# Altium PCB Bargraph_64.PcbDoc
Units mil, origin at the board's own origin, x right, y up, seen from the top; angles counter-clockwise.
Board outline 3937.01 x 196.85 mil, 2 copper layers (Top Layer, Bottom Layer); 65 components, 16 nets, 144 pads, 67 vias.
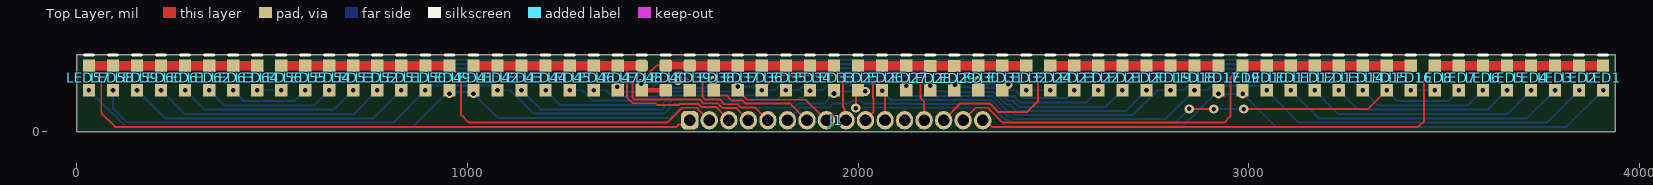
[diagram p0: Top Layer view]
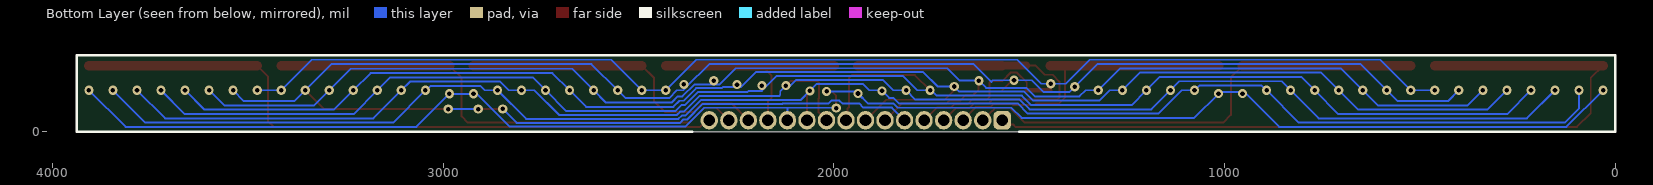
[diagram p1: Bottom Layer view, seen from below]
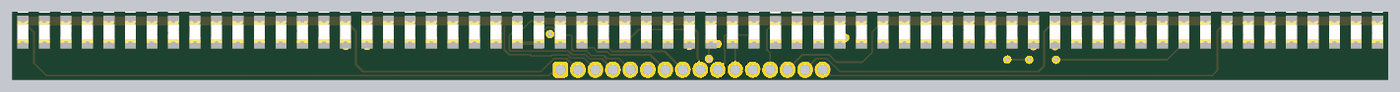
[diagram p2: 3D render of the assembled board from above, using the file's embedded part models]

## Layer stack, top to bottom
Top Solder: solder mask 0.4, Solder Resist, Dk 3.5
Top Layer: signal copper 1.4
Dielectric 1: dielectric 12.6, FR-4, Dk 4.8
Bottom Layer: signal copper 1.4
Bottom Solder: solder mask 0.4, Solder Resist, Dk 3.5

## Board outline
0.08,0.35 3937.09,0.35 3937.09,197.2 0.08,197.2

## Design rules (kind name [scope] priority, off if disabled: settings)
BoardOutlineClearance [All] p1: gap=10 ignorepadtopadclearanceinfootprint=FALSE except(0: Arc-SplitContinuation Track-SplitContinuation SMDPad-SplitContinuation THPad-SplitContinuation Via-SplitContinuation Fill-SplitContinuation Poly-SplitContinuation Region-SplitContinuation Text-SplitContinuation)
Clearance [All] p1: gap=5 ignorepadtopadclearanceinfootprint=FALSE except(0: Arc-Hole Track-Hole SMDPad-Hole THPad-Hole Via-Hole Fill-Hole Poly-Hole Region-Hole Text-Hole)
HoleSize [All] p1: absolutevalues=TRUE maxlimit=248.03 minlimit=11.81 maxpercent=80.000 minpercent=20.000
PlaneConnect [All] p1: planeconnectstyle=Direct reliefexpansion=20 reliefentries=4 reliefconductorwidth=10 reliefairgap=10
PolygonConnect [All] p1: connectstyle=Direct reliefconductorwidth=10 reliefentries=4 polygonreliefangle="90 Angle" airgapwidth=10
RoutingVias [All] p1: holewidth=11.81 width=23.62 viastyle="Through Hole" minholewidth=11.81 minwidth=23.62 maxholewidth=248.03 maxwidth=1000
SolderMaskExpansion SolderMaskExpansion_1 [IsVia] p1: expansion=0 istentingtop=FALSE soldermaskfromhole=TRUE
SolderMaskExpansion [NOT IsVia] p2: expansion=1.97 istentingtop=FALSE
Width [All] p1: maxlimit=1000 minlimit=5 preferedwidth=6
28 further rules are at their usual default settings.

## Components (designator, comment, footprint, x,y, rotation, side; value= is the part's Value field where it differs from the comment)
J1 "16pin" 16pos_127 1568.58,29.88 r0 top
LED1 "150060GS75000" 0603_A#1 3906.33,138.15 r270 top
LED2 "150060GS75000" 0603_A#1 3844.81,138.15 r270 top
LED3 "150060GS75000" 0603_A#1 3783.3,138.15 r270 top
LED4 "150060GS75000" 0603_A#1 3721.78,138.15 r270 top
LED5 "150060GS75000" 0603_A#1 3660.27,138.15 r270 top
LED6 "150060GS75000" 0603_A#1 3598.75,138.15 r270 top
LED7 "150060GS75000" 0603_A#1 3537.23,138.15 r270 top
LED8 "150060GS75000" 0603_A#1 3475.72,138.15 r270 top
LED9 "150060GS75000" 0603_A#1 2983.59,138.15 r270 top
LED10 "150060GS75000" 0603_A#1 3045.11,138.15 r270 top
LED11 "150060GS75000" 0603_A#1 3106.62,138.15 r270 top
LED12 "150060GS75000" 0603_A#1 3168.14,138.15 r270 top
LED13 "150060GS75000" 0603_A#1 3229.66,138.15 r270 top
LED14 "150060GS75000" 0603_A#1 3291.17,138.15 r270 top
LED15 "150060GS75000" 0603_A#1 3352.69,138.15 r270 top
LED16 "150060GS75000" 0603_A#1 3414.2,138.15 r270 top
LED17 "150060GS75000" 0603_A#1 2922.08,138.15 r270 top
LED18 "150060GS75000" 0603_A#1 2860.56,138.15 r270 top
LED19 "150060GS75000" 0603_A#1 2799.05,138.15 r270 top
LED20 "150060GS75000" 0603_A#1 2737.53,138.15 r270 top
LED21 "150060GS75000" 0603_A#1 2676.01,138.15 r270 top
LED22 "150060GS75000" 0603_A#1 2614.5,138.15 r270 top
LED23 "150060GS75000" 0603_A#1 2552.98,138.15 r270 top
LED24 "150060GS75000" 0603_A#1 2491.47,138.15 r270 top
LED25 "150060GS75000" 0603_A#1 1999.34,138.15 r270 top
LED26 "150060GS75000" 0603_A#1 2060.86,138.15 r270 top
LED27 "150060GS75000" 0603_A#1 2122.37,138.15 r270 top
LED28 "150060GS75000" 0603_A#1 2183.89,137.41 r270 top
LED29 "150060GS75000" 0603_A#1 2245.4,137.41 r270 top
LED30 "150060GS75000" 0603_A#1 2306.92,138.15 r270 top
LED31 "150060GS75000" 0603_A#1 2368.43,138.15 r270 top
LED32 "150060GS75000" 0603_A#1 2429.95,138.15 r270 top
LED33 "150060GS75000" 0603_A#1 1937.82,138.15 r270 top
LED34 "150060GS75000" 0603_A#1 1876.31,138.15 r270 top
LED35 "150060GS75000" 0603_A#1 1814.79,138.15 r270 top
LED36 "150060GS75000" 0603_A#1 1753.28,138.15 r270 top
LED37 "150060GS75000" 0603_A#1 1691.76,138.15 r270 top
LED38 "150060GS75000" 0603_A#1 1630.25,138.15 r270 top
LED39 "150060GS75000" 0603_A#2 1568.73,138.15 r270 top
LED40 "150060GS75000" 0603_A#3 1507.21,138.15 r270 top
LED41 "150060GS75000" 0603_A#1 1015.09,138.15 r270 top
LED42 "150060GS75000" 0603_A#1 1076.6,138.15 r270 top
LED43 "150060GS75000" 0603_A#1 1138.12,138.15 r270 top
LED44 "150060GS75000" 0603_A#1 1199.64,138.15 r270 top
LED45 "150060GS75000" 0603_A#1 1261.15,138.15 r270 top
LED46 "150060GS75000" 0603_A#1 1322.67,138.15 r270 top
LED47 "150060GS75000" 0603_A#1 1384.18,138.15 r270 top
LED48 "150060GS75000" 0603_A#4 1445.7,138.15 r270 top
LED49 "150060GS75000" 0603_A#1 953.57,138.15 r270 top
LED50 "150060GS75000" 0603_A#1 892.06,138.15 r270 top
LED51 "150060GS75000" 0603_A#1 830.54,138.15 r270 top
LED52 "150060GS75000" 0603_A#1 769.03,138.15 r270 top
LED53 "150060GS75000" 0603_A#1 707.51,138.15 r270 top
LED54 "150060GS75000" 0603_A#1 645.99,138.15 r270 top
LED55 "150060GS75000" 0603_A#1 584.48,138.15 r270 top
LED56 "150060GS75000" 0603_A#1 522.96,138.15 r270 top
LED57 "150060GS75000" 0603_A#1 30.84,138.15 r270 top
LED58 "150060GS75000" 0603_A#1 92.35,138.15 r270 top
LED59 "150060GS75000" 0603_A#1 153.87,138.15 r270 top
LED60 "150060GS75000" 0603_A#1 215.38,138.15 r270 top
LED61 "150060GS75000" 0603_A#1 276.9,138.15 r270 top
LED62 "150060GS75000" 0603_A#1 338.42,138.15 r270 top
LED63 "150060GS75000" 0603_A#1 399.93,138.15 r270 top
LED64 "150060GS75000" 0603_A#1 461.45,138.15 r270 top

## Footprints (in the part's own frame and the unit in brackets; to place one, negate y for a bottom-side part, rotate by r counter-clockwise, add the part's x,y. Pads: shape width x height; smd on the part's side, far side on the other; paste and mask are expansions set on the pad)
16pos_127 [mil]
  rrect50% 44x47 hole 30: 1(0,0)
  oval 44x47 hole 30: 2(50,0) 3(100,0) 4(150,0) 5(200,0) 6(250,0) 7(300,0) 8(350,0) 13(600,0) 14(650,0) 15(700,0) 16(750,0)
  oval 44x47 hole 30 mask+2: 9(400,0) 10(450,0) 11(500,0) 12(550,0)
0603_A#1 [mm] "Chip LED, 2-Leads, Body 1.6x0.8mm, IPC Medium Density"
  rect 0.8x0.8 smd: 1(-0.8,0) 2(0.8,0)
  silkscreen extent -1.5,-0.3 -1.5,0.3, body extent -0.8,-0.4 0.8,0.4, height 0.7
0603_A#2 [mm] "Chip LED, 2-Leads, Body 1.6x0.8mm, IPC Medium Density"
  rrect30% 0.8x0.8 smd: 1(-0.8,0)
  rect 0.8x0.8 smd: 2(0.8,0)
  silkscreen extent -1.5,-0.3 -1.5,0.3, body extent -0.8,-0.4 0.8,0.4, height 0.7
0603_A#3 [mm] "Chip LED, 2-Leads, Body 1.6x0.8mm, IPC Medium Density"
  rrect30% 0.8x0.8 smd: 1(-0.8,0)
  rrect20% 0.8x0.8 smd: 2(0.8,0)
  silkscreen extent -1.5,-0.3 -1.5,0.3, body extent -0.8,-0.4 0.8,0.4, height 0.7
0603_A#4 [mm] "Chip LED, 2-Leads, Body 1.6x0.8mm, IPC Medium Density"
  rrect50% 0.8x0.8 smd: 1(-0.8,0)
  rect 0.8x0.8 smd: 2(0.8,0)
  silkscreen extent -1.5,-0.3 -1.5,0.3, body extent -0.8,-0.4 0.8,0.4, height 0.7

## Part data
J1: "SQ Post Socket, Through-hole, Vertical, -55 to 125 degC, 1.,27 mm Pitch, 16-Pin, male, RoHS", Manufacturer=Samtec, PartNumber=SSW-116-02-G-S, Temperature Range="-55 to 125 degC", ComponentLink1Description="Manufacturer URL", ComponentLink1URL=http://www.samtec.com, ComponentLink2Description=Datasheet, ComponentLink2URL=http://www.samtec.com/documents/webfiles/pdf/SSW_TH.PDF, ComponentLink3Description="Package Specification", ComponentLink3URL=http://www.samtec.com/documents/webfiles/cpdf/SSW-1XX-XX-XXX-X-XX-XXX-XX-MKT.pdf, DatasheetVersion=F-214, Mounting Technology=Through-hole, Orientation=Vertical, PackageDescription="Assembly, Socket Strip .016 X .031 Tail", PackageReference=SSW-116-02-X-S, PackageVersion="CA, 6/1987", Pitch="2.54 mm", RoHS=True
LED1 LED2 LED3 LED4 LED5 LED6 LED7 LED8 LED9 LED10 LED11 LED12 LED13 LED14 LED15 LED16 LED17 LED18 LED19 LED20 LED21 LED22 LED23 LED24 LED25 LED26 LED27 LED28 LED29 LED30 LED31 LED32 LED33 LED34 LED35 LED36 LED37 LED38 LED39 LED40 LED41 LED42 LED43 LED44 LED45 LED46 LED47 LED48 LED49 LED50 LED51 LED52 LED53 LED54 LED55 LED56 LED57 LED58 LED59 LED60 LED61 LED62 LED63 LED64: library part CMP-1426-00002-1, "SMD mono-color Chip LED, WL-SMCW, Green", Color=Green, Manufacturer="Wuerth Elektronik", ComponentLink1Description="Manufacturer URL", ComponentLink1URL=http://www.we-online.com, ComponentLink2Description=Datasheet, ComponentLink2URL=http://katalog.we-online.com/led/datasheet/150060GS75000.pdf, PackageReference=0603_A, PartNumber=150060GS75000

## Via types
v1: diameter 23.62, hole 11.81, Top Layer to Bottom Layer, 67 vias

## Nets (pads, with @x,y where several pads share a name; then routed paths per layer and width w, separated by ;. In a path a pad name is that pad's centre, name@x,y a point inside that pad or via, vN(x,y) a via of type N, cw(c..) or ccw(c..) an arc to the next point about the centre after c; other vN are vias at no path point)
NetJ1_1: J1.1 LED57.1 LED58.1 LED59.1 LED60.1 LED61.1 LED62.1 LED63.1 LED64.1 | length 2093
  Top Layer w5: LED57.1 62.33,138.15 62.33,48.29 97.77,12.85 1534.77,12.85 1541.08,19.16 1557.86,19.16 J1.1
  Top Layer w25: LED57.1 LED58.1 LED59.1 LED60.1 LED61.1 LED62.1 LED63.1 LED64.1
NetJ1_2: J1.2 LED49.1 LED50.1 LED51.1 LED52.1 LED53.1 LED54.1 LED55.1 LED56.1 | length 1241.1
  Top Layer w5: LED49.1 983.59,139.63 983.59,43.78 1003.4,23.98 1511.6,23.98 1549.51,61.88 1586.25,61.88 1594.72,53.41 1595.06,53.41 J1.2
  Top Layer w25: LED56.1 LED55.1 LED54.1 LED53.1 LED52.1 LED51.1 LED50.1 LED49.1
NetJ1_3: J1.3 LED41.1 LED42.1 LED43.1 LED44.1 LED45.1 LED46.1 LED47.1 LED48.1 | length 803.1
  Top Layer w5: 1414.94,169.65 1407.81,162.51 1407.81,88.3 1422.7,73.41 1481.39,73.41 1485.72,69.08 1541.15,69.08 1543.95,71.88 1590.39,71.88 1598.86,63.41 1636.56,63.41 1668.58,31.38 J1.3
  Top Layer w25: LED41.1 LED42.1 LED43.1 LED44.1 LED45.1 LED46.1 LED47.1 1414.94,169.65 LED48.1
NetJ1_4: J1.4 LED33.1 LED34.1 LED35.1 LED36.1 LED37.1 LED38.1 LED39.1 LED40.1 | length 893.5
  Top Layer w5: LED40.1 1483.19,169.65 1459.94,146.4 1439.92,146.4 1422.45,128.92 1422.45,87.8 1426.84,83.41 1593.01,83.41 1603.01,73.41 1640.7,73.41 1653.22,60.88 1687.58,60.88 J1.4
  Top Layer w20: LED40.1 LED39.1
  Top Layer w25: LED39.1 LED38.1 LED37.1 LED36.1 LED35.1 LED34.1 LED33.1
NetJ1_5: J1.5 LED8.2 LED16.2 LED24.2 LED32.2 LED40.2 LED48.2 LED56.2 LED64.2 | length 3621.6
  Top Layer w5: LED40.2 1505.88,107.99 1505.88,126.97 1531.05,152.15 1546.89,152.15 1569.14,129.9 1597.79,129.9 1600.72,126.97 1600.72,89.84 1607.15,83.41 1644.84,83.41 1657.37,70.88 1691.73,70.88 1700.2,62.41 1736.06,62.41 J1.5
  Top Layer w12: LED48.2 1504.55,106.65 LED40.2@1505.88,107.99
  Bottom Layer w5: v1(461.45,106.65) v1(522.96,106.65) 601.01,184.71 1344.41,184.71 1405.73,123.39 1444.52,123.39 v1(1444.67,123.23) ; v1@1444.67,123.39 1468.34,123.39 1529.66,184.71 2351.9,184.71 v1(2429.95,106.65) v1(2491.47,106.65) 2569.52,184.71 3336.15,184.71 v1(3414.2,106.65) v1(3475.72,106.65)
NetJ1_6: J1.6 LED7.2 LED15.2 LED23.2 LED31.2 LED39.2 LED47.2 LED55.2 LED63.2 | length 5038.1
  Top Layer w5: v1(1538.47,132.25) 1541.4,129.32 1541.4,128.31 1547.08,128.31 LED39.2 ; v1(2847.15,59.04) 2847.46,58.73 2909.47,58.73 v1(2909.77,58.43) ; v1(2986.55,58.43) 3304.46,58.43 v1(3352.69,106.65)
  Bottom Layer w5: v1(399.93,106.65) 427.73,78.85 556.68,78.85 v1(584.48,106.65) 651.53,173.71 1325.08,173.71 v1(1383.26,115.52) ; v1@1384.29,115.52 1384.29,114.49 1396.9,101.88 1462.39,101.88 1492.76,132.25 v1(1538.47,132.25) 1592.66,132.25 1596.6,128.31 1642,173.71 2318.39,173.71 v1@2376.94,115.16 ; J1.6 1851.06,62.36 1924.54,62.36 1935.06,72.88 1978.09,72.88 1985.58,80.38 2005.93,80.38 2014.1,72.2 2131.23,72.2 2131.55,71.88 2335.36,71.88 2375.39,31.85 2384.68,31.85 2393.19,23.34 2811.46,23.34 v1(2847.15,59.04) ; v1(2383.52,121.74) v1@2376.94,115.16 ; v1(2909.77,58.43) v1(2986.55,58.43) ; v1(3537.23,106.65) 3509.43,78.85 3380.49,78.85 v1(3352.69,106.65) 3285.64,173.71 2620.03,173.71 v1(2552.98,106.65) 2532.67,86.34 2421.54,86.34 2401.23,106.65 2385.44,106.65 v1@2376.94,115.16
NetJ1_7: J1.7 LED6.2 LED14.2 LED22.2 LED30.2 LED38.2 LED46.2 LED54.2 LED62.2 | length 3807.3
  Top Layer w5: v1(1628.28,131.26) 1628.86,130.68 1628.86,108.04 1643.49,93.41 1662.91,93.41 1675.43,80.88 1703.39,80.88 1711.87,72.41 1826.06,72.41 J1.7
  Bottom Layer w5: v1(338.42,106.65) 377.21,67.85 607.19,67.85 v1(645.99,106.65) 702.05,162.71 1266.62,162.71 v1(1322.67,106.65) 1355.46,106.65 1371.23,90.88 1485.17,90.88 1507.23,112.94 1609.96,112.94 v1(1628.28,131.26) 1677.99,131.26 1709.74,163.02 2250.56,163.02 2291.69,121.88 v1@2306.92,121.88 ; v1(2306.92,131.19) v1@2306.92,121.88 ; v1(3598.75,106.65) 3559.95,67.85 3329.97,67.85 v1(3291.17,106.65) 3236.05,161.77 2669.62,161.77 v1(2614.5,106.65) 2583.19,75.34 2414.73,75.34 2399.25,90.82 2387.13,90.82 2356.07,121.88 v1@2306.92,121.88
NetJ1_8: J1.8 LED5.2 LED13.2 LED21.2 LED29.2 LED37.2 LED45.2 LED53.2 LED61.2 | length 3900
  Top Layer w5: LED37.2 1716.01,82.41 1866.06,82.41 J1.8
  Bottom Layer w5: v1(276.9,106.65) 326.7,56.85 657.71,56.85 v1(707.51,106.65) 752.56,151.71 1216.1,151.71 v1(1261.15,106.65) 1293.94,106.65 1320.71,79.88 1489.72,79.88 1512.78,102.94 1678.39,102.94 v1(1691.76,116.31) 1734.21,116.31 1770.92,153.02 2199.04,153.02 2236.86,115.19 2245.4,115.19 2282.82,115.19 2286.13,111.88 2351.93,111.88 2383.99,79.82 2394.69,79.82 2410.17,64.34 2633.7,64.34 v1(2676.01,106.65) 2720.13,150.77 3185.54,150.77 v1(3229.66,106.65) 3279.46,56.85 3610.47,56.85 v1(3660.27,106.65) ; v1@2247.39,115.19 v1(2247.39,121.19)
NetJ1_9: J1.9 LED4.2 LED12.2 LED20.2 LED28.2 LED36.2 LED44.2 LED52.2 LED60.2 | length 4115.7
  Top Layer w5: v1(1753.28,106.65) 1792.02,145.4 1953.08,145.4 1961.07,137.41 1961.07,87.8 1961.03,87.76 1961.03,62.62 1964.78,58.88 1964.78,33.69 J1.9
  Bottom Layer w5: v1(215.38,106.65) 276.18,45.85 708.23,45.85 v1(769.03,106.65) 803.08,140.71 1165.58,140.71 v1(1199.64,106.65) 1237.41,68.88 1494.28,68.88 1518.34,92.94 1736.39,92.94 1750.1,106.65 v1(1753.28,106.65) 1786.07,106.65 1822.43,143.02 2146.79,143.02 v1@2177.49,112.31 ; v1(2183.89,118.71) v1@2177.49,112.31 ; v1(3721.78,106.65) 3660.98,45.85 3228.94,45.85 v1(3168.14,106.65) 3135.02,139.77 2770.65,139.77 v1(2737.53,106.65) 2684.22,53.34 2405.61,53.34 2390.14,68.82 2380.84,68.82 2347.78,101.88 2220.71,101.88 2217.55,105.04 2183.89,105.04 2183.89,105.92 v1@2177.49,112.31
NetJ1_10: J1.10 LED3.2 LED11.2 LED19.2 LED27.2 LED35.2 LED43.2 LED51.2 LED59.2 | length 4110.2
  Top Layer w5: J1.10 2038.78,50.08 2038.78,85.21 2037.61,86.38 2037.61,125.51 2042,129.9 2111.18,129.9 v1(2122.37,118.71)
  Bottom Layer w5: v1(153.87,106.65) 225.67,34.85 758.74,34.85 v1(830.54,106.65) 853.59,129.71 1115.07,129.71 v1(1138.12,106.65) 1186.89,57.88 1498.84,57.88 1523.89,82.94 1791.08,82.94 v1(1814.79,106.65) 1847.58,106.65 1873.95,133.02 2096.01,133.02 v1@2116.35,112.68 ; v1(2122.37,118.71) v1@2116.35,112.68 ; v1(3783.3,106.65) 3711.5,34.85 3178.42,34.85 v1(3106.62,106.65) 3084.51,128.77 2853.96,128.77 2831.84,106.65 v1(2799.05,106.65) 2766.25,106.65 2702.94,43.34 2401.47,43.34 2392.96,51.85 2383.67,51.85 2343.64,91.88 2139.84,91.88 2136.89,94.83 2136.89,104.19 2128.4,112.68 v1@2116.35,112.68
NetJ1_11: J1.11 LED2.2 LED10.2 LED18.2 LED26.2 LED34.2 LED42.2 LED50.2 LED58.2 | length 4137.1
  Top Layer w5: v1(2060.86,105.04) 2068.58,97.32 J1.11
  Bottom Layer w5: v1(92.35,106.65) 92.35,60.69 129.19,23.85 809.26,23.85 v1(892.06,106.65) 892.92,106.65 904.73,118.46 1063.93,118.46 1075.74,106.65 v1(1076.6,106.65) 1109.4,106.65 1169.17,46.88 1503.39,46.88 1529.39,72.88 1833.3,72.88 1847.6,87.18 1858.45,87.18 v1(1876.31,105.04) ; v1@1876.31,106.65 1909.1,106.65 1925.46,123.02 2042.88,123.02 v1(2060.86,105.04) 2083.69,82.2 2135.37,82.2 2135.7,81.88 2339.5,81.88 2379.53,41.85 2388.82,41.85 2397.33,33.34 2787.25,33.34 v1(2860.56,106.65) 2893.35,106.65 2904.47,117.77 3031.74,117.77 3042.86,106.65 v1(3045.11,106.65) 3127.91,23.85 3762.01,23.85 v1(3844.81,106.65)
NetJ1_12: J1.12 LED1.2 LED9.2 LED17.2 LED25.2 LED33.2 LED41.2 LED49.2 LED57.2 | length 4258.3
  Top Layer w5: v1(1993.58,61.07) 1993.58,92.64 2004.65,103.71 v1(2018.14,103.71)
  Bottom Layer w5: v1(30.84,106.65) 124.64,12.85 859.97,12.85 949.47,102.35 950.11,101.72 965.28,101.72 965.91,102.35 1005.85,102.35 1010.05,98.15 v1(1015.09,98.15) 1077.36,35.88 1519.12,35.88 1545.12,61.88 1836.44,61.88 1846.92,72.36 1911.79,72.36 v1(1937.82,98.39) 1943.14,103.71 v1(2018.14,103.71) ; v1(1993.58,61.07) 1994.4,61.88 2117.45,61.88 ; J1.12 2118.58,60.75 2117.45,61.88 ; v1(3906.33,106.65) 3812.53,12.85 3068.2,12.85 v1(2983.59,97.46) v1(2922.08,97.46) 2917.48,102.06 2828.77,13.34 2379.76,13.34 2331.22,61.88 2117.45,61.88
  other v1: 953.67,98.15
NetJ1_13: J1.13 LED25.1 LED26.1 LED27.1 LED28.1 LED29.1 LED30.1 LED31.1 LED32.1 | length 583.4
  Top Layer w5: J1.13 2168.58,77.7 2159.64,86.65 2159.64,144.66 LED28.1
  Top Layer w25: LED25.1 LED26.1 LED27.1 LED30.1 LED31.1 LED32.1
NetJ1_14: J1.14 LED17.1 LED18.1 LED19.1 LED20.1 LED21.1 LED22.1 LED23.1 LED24.1 | length 813.8
  Top Layer w5: J1.14 2261.58,72.88 2336.07,72.88 2357.57,51.38 2432.25,51.38 2459.97,79.09 2459.97,138.15 LED24.1
  Top Layer w25: LED24.1 LED23.1 LED22.1 LED21.1 LED20.1 LED19.1 LED18.1 LED17.1
NetJ1_15: J1.15 LED9.1 LED10.1 LED11.1 LED12.1 LED13.1 LED14.1 LED15.1 LED16.1 | length 1292.7
  Top Layer w5: J1.15 2300.58,61.88 2331.22,61.88 2352.72,40.38 2353.02,40.38 2369.54,23.85 2936.23,23.85 2952.1,39.72 2952.1,138.15 LED9.1
  Top Layer w25: LED9.1 LED10.1 LED11.1 LED12.1 LED13.1 LED14.1 LED15.1 LED16.1
NetJ1_16: J1.16 LED1.1 LED2.1 LED3.1 LED4.1 LED5.1 LED6.1 LED7.1 LED8.1 | length 1726.6
  Top Layer w5: J1.16 2324.92,29.88 2341.95,12.85 3433.1,12.85 3448.16,27.91 3448.16,142.09 3455.31,149.24 LED8.1
  Top Layer w25: LED8.1 LED7.1 LED6.1 LED5.1 LED4.1 LED3.1 LED2.1 LED1.1

## Silkscreen, mask and mechanical layers (free items; w line width, h text height)
Bottom Overlay:
  lines w6.3: 1525.59,0 0,0 0,196.85 3937.01,196.85 3937.01,0 2362.2,0